# EAGLE board Shield (EAGLE 9.6.2)
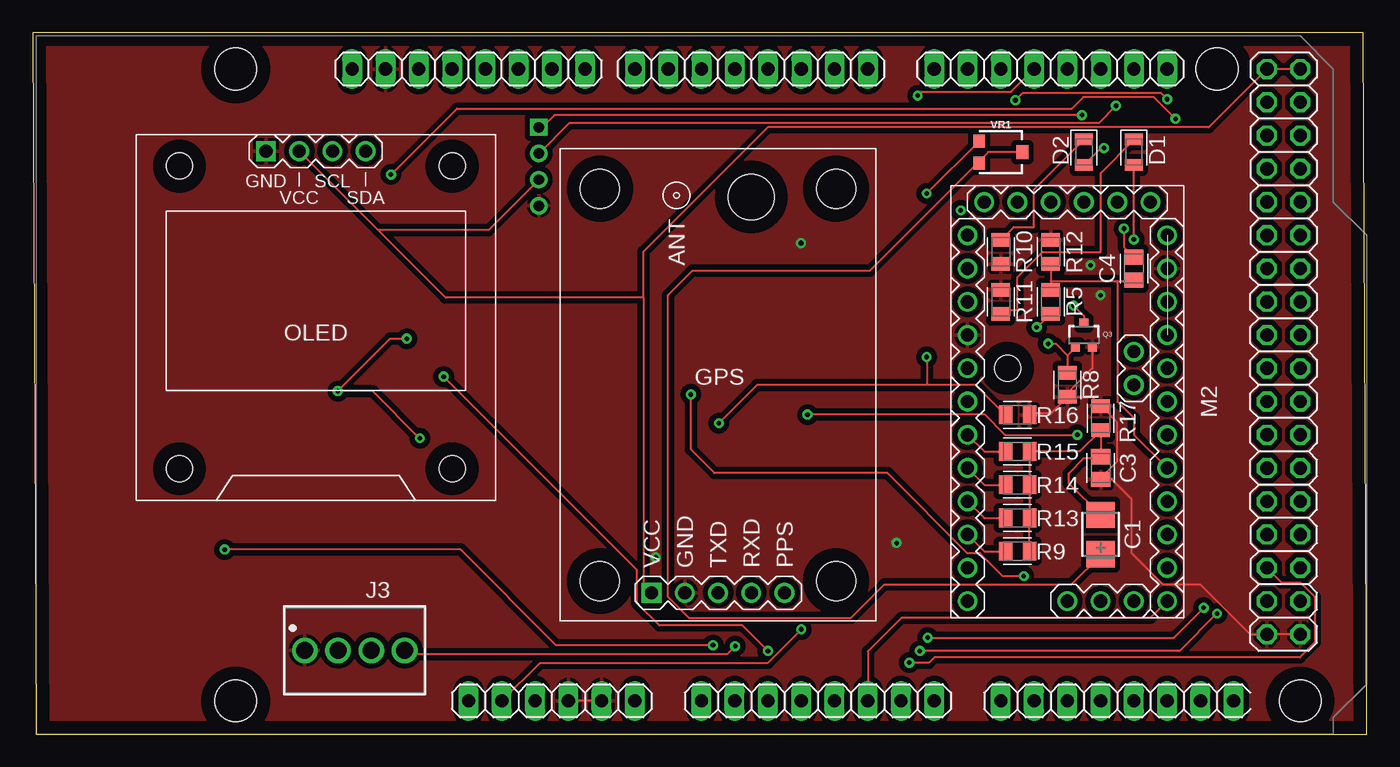
[diagram p0: board, top side]
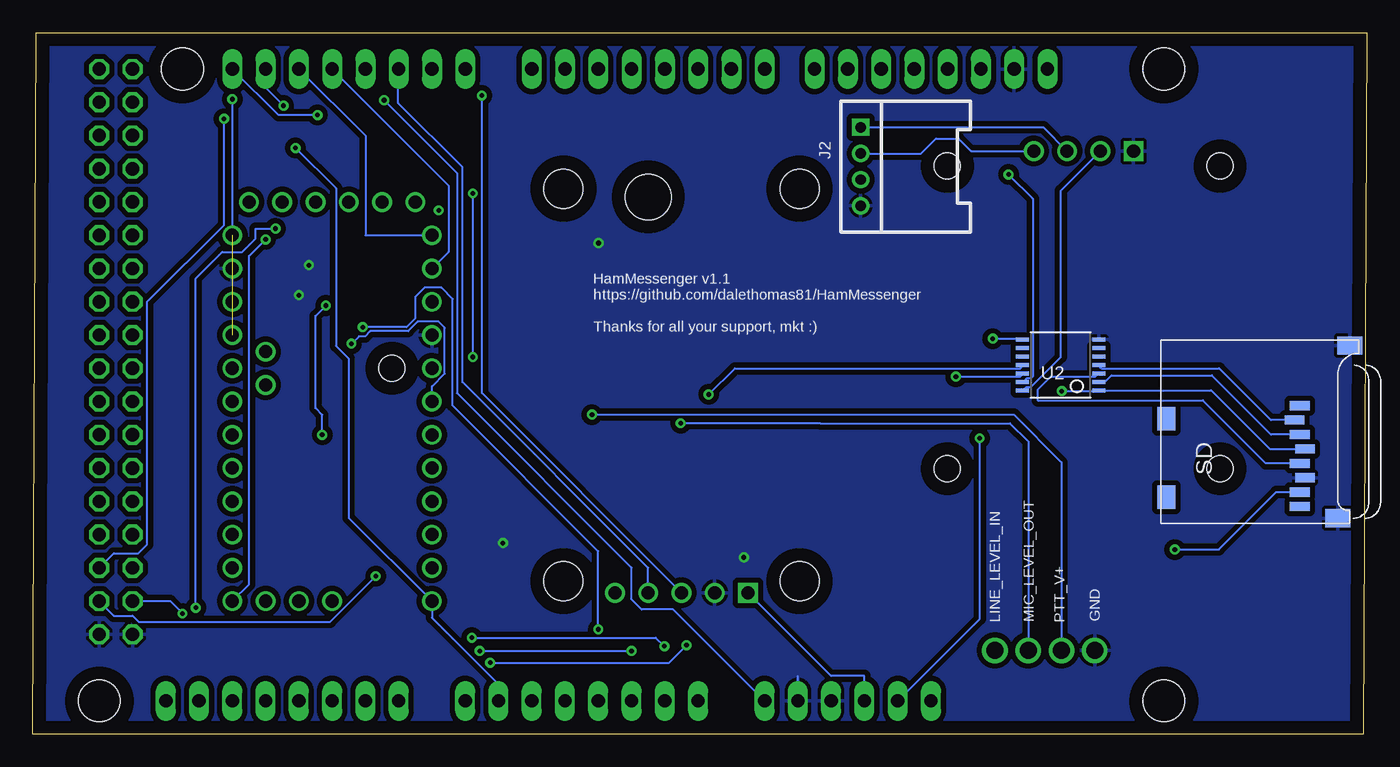
[diagram p1: board, bottom side, seen from below]

Size 101.85 x 53.57 mm. Coordinates in mm from the lower left corner, seen from the top.
Outline: 0.25,0 101.85,0 101.6,53.57 0,53.57 0.25,0
Copper layers (1*16): Top 0.035mm / dielectric 1.5mm / Bottom 0.035mm
Design rules "default": minimum track width 6mil, minimum drill 0.35mm, track to track 6mil, track to pad 6mil, pad to pad 6mil, via to via 6mil, smd to smd 6mil, copper to edge 40mil, drill to drill 6mil, minimum pad ring 10mil, minimum via ring 8mil, stop-mask expansion 4mil, vias tented up to drill 0mil, thermal gap 10mil

## Footprints (pad centres in the part's own frame; a part is rotated, then mirrored left to right if it is on the bottom)
CT3528 = smd 2 x 2.2: + 1.5,0; - -1.5,0
CAPC2012X110 = smd 1.165 x 1.465: 1 -0.875,0; 2 0.875,0
LEDC2012X105N_RND-R = smd 0.862 x 1.362: A 0.975,0; C -0.975,0
GPS-RECEIVER-NEO6M = drill 1 square: 1 -15.875,5.08 | drill 1: 2 -15.875,2.54; 3 -15.875,0; 4 -15.875,-2.54; 5 -15.875,-5.08 | hole 3: -14.986,9.017; -14.986,-9.017; 14.986,-9.017; 14.986,9.017 | hole 3.5: 14.351,-2.54
HW4-2.0-90D = drill 0.8 pad 1.27 square: 1 -3,0 | drill 0.8 pad 1.27: 2 -1,0; 3 1,0; 4 3,0
691210910004 = drill 1.3: 1 -3.81,0; 2 -1.27,0; 3 1.27,0; 4 3.81,0
MEGA_ARDUINO = drill 1.016 long: 1 33.02,2.54; 2 35.56,2.54; 3 38.1,2.54; 4 40.64,2.54; 5 43.18,2.54; 6 45.72,2.54; 7 50.8,2.54; 8 53.34,2.54; 9 55.88,2.54; 10 58.42,2.54; 11 60.96,2.54; 12 63.5,2.54; 13 66.04,2.54; 14 68.58,2.54; 15 73.66,2.54; 16 76.2,2.54; 17 78.74,2.54; 18 81.28,2.54; 19 83.82,2.54; 20 86.36,2.54; 21 88.9,2.54; 22 91.44,2.54; 23 86.36,50.8; 24 83.82,50.8; 25 81.28,50.8; 26 78.74,50.8; 27 76.2,50.8; 28 73.66,50.8; 29 71.12,50.8; 30 68.58,50.8; 31 63.5,50.8; 32 60.96,50.8; 33 58.42,50.8; 34 55.88,50.8; 35 53.34,50.8; 36 50.8,50.8; 37 48.26,50.8; 38 45.72,50.8; 39 41.91,50.8; 40 39.37,50.8; 41 36.83,50.8; 42 34.29,50.8; 43 31.75,50.8; 44 29.21,50.8; 45 26.67,50.8; 46 24.13,50.8 | drill 1.016 octagon: 47 93.98,50.8; 48 96.52,50.8; 49 93.98,48.26; 50 96.52,48.26; 51 93.98,45.72; 52 96.52,45.72; 53 93.98,43.18; 54 96.52,43.18; 55 93.98,40.64; 56 96.52,40.64; 57 93.98,38.1; 58 96.52,38.1; 59 93.98,35.56; 60 96.52,35.56; 61 93.98,33.02; 62 96.52,33.02; 63 93.98,30.48; 64 96.52,30.48; 65 93.98,27.94; 66 96.52,27.94; 67 93.98,25.4; 68 96.52,25.4; 69 93.98,22.86; 70 96.52,22.86; 71 93.98,20.32; 72 96.52,20.32; 73 93.98,17.78; 74 96.52,17.78; 75 93.98,15.24; 76 96.52,15.24; 77 93.98,12.7; 78 96.52,12.7; 79 93.98,10.16; 80 96.52,10.16; 81 93.98,7.62; 82 96.52,7.62 | hole 3.2: 15.24,50.8; 15.24,2.54; 90.17,50.8; 96.52,2.54 | hole 2: 74.168,27.94
ARDUINO-PRO-MINI = drill 1: J1.1 -15.24,6.35; J1.2 -15.24,3.81; J1.3 -15.24,1.27; J1.4 -15.24,-1.27; J1.5 -15.24,-3.81; J1.6 -15.24,-6.35; J2.1 -1.27,5.08; J2.2 -3.81,5.08; J3.1 15.24,0; J3.2 15.24,2.54; J3.3 15.24,5.08; J6.1 -12.7,7.62; J6.2 -10.16,7.62; J6.3 -7.62,7.62; J6.4 -5.08,7.62; J6.5 -2.54,7.62; J6.6 0,7.62; J6.7 2.54,7.62; J6.8 5.08,7.62; J6.9 7.62,7.62; J6.10 10.16,7.62; J6.11 12.7,7.62; J6.12 15.24,7.62; J7.1 15.24,-7.62; J7.2 12.7,-7.62; J7.3 10.16,-7.62; J7.4 7.62,-7.62; J7.5 5.08,-7.62; J7.6 2.54,-7.62; J7.7 0,-7.62; J7.8 -2.54,-7.62; J7.9 -5.08,-7.62; J7.10 -7.62,-7.62; J7.11 -10.16,-7.62; J7.12 -12.7,-7.62
DISPLAY-OLED-128X64-I2C = drill 1 square: 1 -3.81,12.7 | drill 1: 2 -1.27,12.7; 3 1.27,12.7; 4 3.81,12.7 | hole 2: -10.414,11.557; 10.414,11.557; 10.414,-11.557; -10.414,-11.557
SOT323 = smd 0.7 x 0.7: 1 -0.65,-0.925; 2 0.65,-0.925; 3 0,0.925
RESC2012X65 = smd 1.031 x 1.42: 1 -0.919,0; 2 0.919,0
MICROSD = smd 0.7 x 1.5: 1 9,-10.64; 2 7.9,-10.24; 3 6.8,-10.64; 4 5.7,-11.04; 5 4.6,-10.64; 6 3.5,-11.04; 7 2.4,-10.64; 8 1.3,-10.64 | smd 1.8 x 1.4: CD1 2,-0.44; CD2 8,-0.44 | smd 1.4 x 1.9: MT1 0.4,-13.54; MT2 13.6,-14.44
TSSOP14 = smd 0.305 x 0.991: 1 -1.95,-2.918; 2 -1.3,-2.918; 3 -0.65,-2.918; 4 0,-2.918; 5 0.65,-2.918; 6 1.3,-2.918; 7 1.95,-2.918; 8 1.95,2.918; 9 1.3,2.918; 10 0.65,2.918; 11 0,2.918; 12 -0.65,2.918; 13 -1.3,2.918; 14 -1.95,2.918
TRIMPOT-SMD-3MM-CLOSED = smd 1 x 0.9: 1 -0.85,-1.65; 3 0.85,-1.65 | smd 1.1 x 0.9: 2 0,1.65

## Placement (x,y rotation side)
C1  4.7uf  [CT3528]  81.53,15.24 270 top
C3  100nf  [CAPC2012X110]  81.53,20.32 270 top
C4  1uf  [CAPC2012X110]  84.07,35.56 90 top
D1  LED_GREEN  [LEDC2012X105N_RND-R]  84.07,44.45 270 top
D2  LED_RED  [LEDC2012X105N_RND-R]  80.26,44.45 270 top
GPS  GPS-RECEIVER-NEO6M  [GPS-RECEIVER-NEO6M]  52.32,26.67 90 top
J2  KEYBOARD GROVE  [HW4-2.0-90D]  38.64,43.35 270 bottom
J3  [691210910004]  24.58,6.39 0 top
M1  [MEGA_ARDUINO]  0.25,0 0 top
M2  ARDUINO-PRO-MINI-3.3V  [ARDUINO-PRO-MINI]  78.99,25.4 270 top
OLED  DISPLAY-OLED-128X64-I2C  [DISPLAY-OLED-128X64-I2C]  21.61,31.83 0 top
Q3  MOSFET-NCHANNEL2N7002PW  [SOT323]  80.26,30.48 0 top
R5  100k  [RESC2012X65]  77.72,33.02 270 top
R8  10k  [RESC2012X65]  78.99,26.67 90 top
R9  1k  [RESC2012X65]  75.18,13.97 180 top
R10  270k  [RESC2012X65]  73.91,36.83 90 top
R11  1k  [RESC2012X65]  73.91,33.02 270 top
R12  100k  [RESC2012X65]  77.72,36.83 270 top
R13  2k2  [RESC2012X65]  75.18,16.51 180 top
R14  3k9  [RESC2012X65]  75.18,19.05 180 top
R15  8k2  [RESC2012X65]  75.18,21.59 180 top
R16  1k  [RESC2012X65]  75.18,24.38 180 top
R17  270  [RESC2012X65]  81.53,24.13 270 top
SD  MICROSD  [MICROSD]  15.75,16.08 90 bottom
U2  [TSSOP14]  23.37,28.19 90 bottom
VR1  100k  [TRIMPOT-SMD-3MM-CLOSED]  73.91,44.45 270 top

## Library data of the parts
C1 SD U2 = adafruit
C3 C4 = Capacitor; CATEGORY: Capacitor
D1 D2 = LED; CATEGORY: LED; COLOR: RED; DESCRIPTION: CHIP LED ROUND; SUB-CATEGORY: CHIP; TYPE: ROUND_TOP
GPS M2 OLED = diy-modules
J2 = OPL_Connector
J3 = Wurth_Connectors_WR-TBL Rising Cage Clamp; DATASHEET-URL: https://www.we-online.com/catalog/datasheet/691210910004.pdf; IR-UL: 6A; MOUNT: THT; PART-NUMBER: 691210910004; PINS: 4; PITCH: 2.54mm; TYPE: Horizontal; WIRE: 30 to 18 (AWG) 0.0509 to 0.823 (mm²); WORKING-VOLTAGE-UL: 150V (AC)
M1 = arduino
Q3 = BeagleBone_Blue_R3; PROD_ID: TRANS-11151
R5 R8-R17 = Resistor; CATEGORY: Resistor; SUB-CATEGORY: Fixed
VR1 = SparkFun-Resistors; PROD_ID: RES-09285

## Nets
+3V3: M1.2 R5.2 SD.4 U2.1 U2.8
+5V: GPS.1 J2.3 M1.3 M1.47 M1.48 OLED.2 U2.14
A0: C4.1 M2.J6.8 R5.1 R12.2
D3: M2.J7.7 Q3.1 R8.2
D4: M2.J7.6 R15.2
D5: M2.J7.5 R14.2
D6: M2.J7.4 R13.2
D7: M2.J7.3 R9.2
D9: D2.A M1.13 M2.J7.1
D10: D1.A M1.12 M2.J6.12
GND: C3.2 GPS.2 J2.4 J3.1 M1.4 M1.5 M1.45 M1.81 M1.82 M2.J6.2 M2.J7.9 OLED.1 Q3.2 R8.1 R10.1 R11.1 R12.1 R16.1 R17.1 SD.6 SD.MT1 SD.MT2 U2.7
LINE_LEVEL_IN: C4.2 J3.4
LINE_LEVEL_OUT: C1.+ VR1.2 VR1.3
MIC_LEVEL_OUT: J3.3 R16.2 VR1.1
MISO: M1.77 SD.7
MOSI: M1.78 U2.13
N$1: SD.3 U2.2
N$2: C1.- C3.1 R9.1 R13.1 R14.1 R15.1 R17.2
N$3: D2.C R10.2
N$4: D1.C R11.2
N$5: SD.5 U2.3
N$6: SD.2 U2.4
PPS: GPS.5
PTT_V+: J3.2 Q3.3
RX_GPS: GPS.3 M1.27
RX_MODEM: M1.25 M2.J7.12
SCK: M1.79 U2.12
SCL: J2.1 M1.23 OLED.3
SDA: J2.2 M1.24 OLED.4
SS: M1.80 U2.11
TX_GPS: GPS.4 M1.28
TX_MODEM: M1.26 M2.J7.11
VCC: M1.6 M2.J6.1 M2.J6.4

## Tracks (layer width: path | path; a pad name or v marks a point on that pad's centre or on a via)
+3V3  (via drill 0.35)
  Top 0.152: v58.67,8 56.12,5.45 38.72,5.45 M1.2 | v76.65,31.08 76.7,31.08 R5.2 | v28.55,30.2 27.29,30.2 v23.29,26.19 25.96,26.19 v29.55,22.6
  Bottom 0.152: v58.67,8 58.67,13.97 69.79,25.08 69.79,33.23 70.65,34.1 71.95,34.1 72.65,33.4 72.65,31.76 72.64,31.75 73.31,31.08 v76.65,31.08 | v23.29,26.19 20.57,26.19 U2.1 20.43,26.26 11.89,26.26 7.41,21.78 SD.4 | v28.55,30.2 26.34,30.2 U2.8 | M1.2 29.55,8.8 v29.55,22.6
+5V
  Top 0.152: M1.48 M1.47 89.79,46.35 56.13,46.35 46.64,36.87 46.64,33.34 | GPS.1 46.64,11.39 46.64,33.34 | 26.36,38.51 31.54,33.34 46.64,33.34 | 26.36,38.51 OLED.2 | J2.3 34.8,38.51 26.36,38.51
  Bottom 0.152: GPS.1 40.89,4.45 38.35,4.45 M1.3 | U2.14 26.13,26.35 25.97,26.51 25.65,26.51 23.37,28.8 23.37,41.51 OLED.2
A0
  Top 0.152: R12.2 77.72,34.61 | 77.72,34.61 R5.1 | 77.72,34.61 82.8,34.61 | 82.8,34.61 84.07,34.61 C4.1 | M2.J6.8 84.07,22.86 84.07,24.13 82.8,25.4 82.8,34.61
D3  (via drill 0.35)
  Top 0.152: Q3.1 78.99,28.93 | 78.99,28.93 R8.2 | v77.52,29.83 78.1,29.83 78.99,28.93
  Bottom 0.152: M2.J7.7 71.37,26.55 70.39,27.53 70.39,31.04 70.85,31.5 72.46,31.5 73.19,30.77 76.08,30.77 76.48,30.38 76.95,30.38 77.49,29.83 v77.52,29.83
D4
  Top 0.152: M2.J7.6 72.64,21.59 R15.2
D5
  Top 0.152: M2.J7.5 72.64,19.05 R14.2
D6
  Top 0.152: M2.J7.4 72.64,16.51 R13.2
D7
  Top 0.152: M2.J7.3 72.64,13.97 R9.2
D9  (via drill 0.35)
  Top 0.152: v81.79,44.77 81.56,44.77 D2.A
  Bottom 0.152: M1.13 66.29,3.81 71.37,8.89 M2.J7.1 77.72,16.51 77.72,28.67 78.71,29.65 78.71,41.69 v81.79,44.77
D10  (via drill 0.35)
  Top 0.152: v84.07,37.78 D1.A | M1.12 63.75,6.32 66.33,8.89 85.34,8.89 M2.J6.12
  Bottom 0.152: v84.07,37.78 85.34,36.51 85.34,11.43 M2.J6.12
GND  (via drill 0.35)
  Top 0.152: M1.5 M1.4 | M1.82 M1.81 92.96,7.62 89.15,11.43 86.3,11.43 83.92,13.81 83.92,17.94 82.18,19.67 81.53,19.67 | 81.53,25.08 R17.1 | R8.1 78.99,26.04 80.91,27.96 Q3.2 | R16.1 76.2,24.48 77.72,24.48 R8.1 | C3.2 81.53,19.56 82.8,20.83 82.8,23.81 81.53,25.08 | R8.1 80.87,25.75 81.53,25.08
  Bottom 0.152: M1.5 43.43,4.45
  other vias: 80.77,35.81 81.53,33.53 58.65,37.5 47.55,13.5 65.95,14.6
  pour Top (isolate 0.406): 0.25,53.34 0.25,0 101.85,0 101.85,53.34
  pour Bottom (isolate 0.406): 0.25,53.59 101.85,53.59 101.85,0 0.25,0
LINE_LEVEL_IN  (via drill 0.35)
  Top 0.152: v53.63,6.71 53.02,6.1 28.69,6.1 J3.4 | v68.33,7.37 87.12,7.37 v89.41,9.65 | v83.31,38.61 83.31,37.2 C4.2
  Bottom 0.152: v89.41,9.65 89.41,34.8 87.38,36.83 85.85,36.83 84.84,37.85 84.84,38.61 v83.31,38.61 | v53.63,6.71 54.29,7.37 v68.33,7.37
LINE_LEVEL_OUT
  Top 0.152: VR1.2 72.96,44.45 72.33,43.81 VR1.3 72.01,43.5 63.91,35.4 50.39,35.4 48.51,33.53 48.51,10.48 50.1,8.89 62.48,8.89 65.02,11.43 79.31,11.43 81.53,13.65 C1.+
MIC_LEVEL_OUT  (via drill 0.35)
  Top 0.152: R16.2 71.98,26.67 68.25,26.67 | v52.39,23.75 55.31,26.67 68.25,26.67 | VR1.1 v68.26,41.3 v68.25,41.3 | v68.25,28.8 68.25,26.67
  Bottom 0.152: J3.3 25.85,22.36 27.23,23.74 41.73,23.74 41.73,23.75 v52.39,23.75 | v68.25,41.3 v68.25,28.8
MISO  (via drill 0.35)
  Top 0.152: v66.93,5.46 68.43,5.46 68.83,5.86 96.74,5.86 97.89,7 97.89,10.48 96.77,11.59 95.34,11.59 M1.77 | v51.94,6.79 39.96,6.79 32.65,14.1 v14.65,14.1
  Bottom 0.152: SD.7 6.91,18.48 11.29,14.1 v14.65,14.1 | v51.94,6.79 53.27,5.46 v66.93,5.46
MOSI  (via drill 0.35)
  Top 0.152: v87.25,46.99 85.58,48.66 80.2,48.66 79.33,47.78 32.38,47.78 v27.35,42.74
  Bottom 0.152: v27.35,42.74 25.5,40.89 25.5,27.3 25.65,27.15 25.97,27.15 26.13,26.99 U2.13 | v87.25,46.99 87.25,38.89 93.12,33.02 93.12,14.48 93.79,13.81 95.66,13.81 M1.78
N$1
  Bottom 0.152: U2.2 20,26.89 19.5,27.4 11.83,27.4 7.31,22.88 SD.3
N$2
  Top 0.152: R9.1 R13.1 R14.1 R15.1 79.91,21.59 R17.2 C3.1 81.53,21.08 80.26,21.08 79.11,19.93 79.11,19.16 C1.-
N$3
  Top 0.152: D2.C 80.26,45.4 76.45,41.59 76.45,38.73 74.9,38.73 R10.2
N$4
  Top 0.152: D1.C 84.07,45.4 81.53,42.86 81.53,36.83 77.09,36.83 75.18,34.92 75.18,32.38 73.91,32.38 R11.2
N$5
  Bottom 0.152: SD.5 7.71,20.68 12.51,25.48 25.12,25.48 25.12,26.31 24.13,27.3 20.73,27.3 20.57,27.46 U2.3
N$6
  Bottom 0.152: SD.2 7.31,23.98 11.27,27.94 20.26,27.94 20.42,28.1 U2.4
N$7  (via drill 0.35)
  other vias: 70.85,40
PTT_V+  (via drill 0.35)
  Top 0.152: v79.76,22.86 74.24,22.86 72.68,24.42 59.17,24.42 v59.15,24.4 | v79.47,32.73 80.26,31.94 Q3.3
  Bottom 0.152: v79.76,22.86 79.76,24.38 80.26,24.89 80.26,31.94 v79.47,32.73 | v59.15,24.4 26.95,24.4 23.31,20.76 J3.2
RX_GPS  (via drill 0.35)
  Top 0.152: v67.56,48.77 67.84,49.05 74.7,49.05 M1.27
  Bottom 0.152: GPS.3 67.56,26.04 v67.56,48.77
RX_MODEM
  Bottom 0.152: M2.J7.12 76.45,38.1 76.45,45.72 M1.25
SCK  (via drill 0.35)
  Top 0.152: v31.37,27.3 46.13,12.54 46.13,10 47.84,8.3 54.19,8.3 v56.13,6.35 | v67.72,6.35 87.57,6.35 v90.42,9.21
  Bottom 0.152: v31.37,27.3 26.45,27.3 26.29,27.46 U2.12 | v67.72,6.35 v56.13,6.35 | v90.42,9.21 91.38,10.16 M1.79
SCL  (via drill 0.35)
  Top 0.152: v80.11,47.28 39.83,47.28 38.9,46.35 J2.1
  Bottom 0.152: v80.11,47.28 83.09,47.28 M1.23 | J2.1 24.7,46.35 OLED.3
SDA  (via drill 0.35)
  Top 0.152: v82.7,48 v82.7,47.99 81.39,46.67 40.97,46.67 J2.2
  Bottom 0.152: v82.7,48 84.07,49.37 M1.24 | J2.2 34.02,44.35 32.89,45.48 31.16,45.48 30.21,44.53 OLED.4
SS  (via drill 0.35)
  Top 0.152: v50.25,25.94 50.25,21.74 52.05,19.94 65.24,19.94 71.37,13.81 72.33,13.81 74.07,12.06 v75.66,12.06
  Bottom 0.152: v50.25,25.94 48.25,27.94 26.45,27.94 26.29,28.1 U2.11 | v75.66,12.06 79.15,8.57 93.76,8.57 94.23,9.05 95.66,9.05 M1.80
TX_GPS
  Bottom 0.152: GPS.4 54.86,12.7 69.05,26.89 69.05,43.3 73.95,48.2 73.95,50.76 M1.28
TX_MODEM
  Bottom 0.152: M2.J7.11 70.1,36.83 70.1,41.91 M1.26
VCC  (via drill 0.35)  (1 unrouted)
  Top 0.152: v75.03,48.42 75.57,48.97 86.15,48.97 86.15,48.95 v86.61,48.49
  Bottom 0.152: M1.6 52.96,9.53 55.37,9.53 56.13,10.29 56.13,12.7 69.47,26.04 69.47,42.86 v75.03,48.42 | v86.61,48.49 M2.J6.1

## Text on the board
bPlace: HamMessenger v1.1 / https://github.com/dalethomas81/HamMessenger / / Thanks for all your support, mkt :) | MIC_LEVEL_OUT | LINE_LEVEL_IN | PTT_V+ | GND